# Altium PCB FLYBACK_SWITCHING_POWER_SUPPLY_V1_1.PcbDoc
Units mil, origin at the board's own origin, x right, y up, seen from the top; angles counter-clockwise.
Board outline 3175 x 1725 mil, 2 copper layers (Top Layer, Bottom Layer); 36 components, 23 nets, 88 pads, 4 vias.
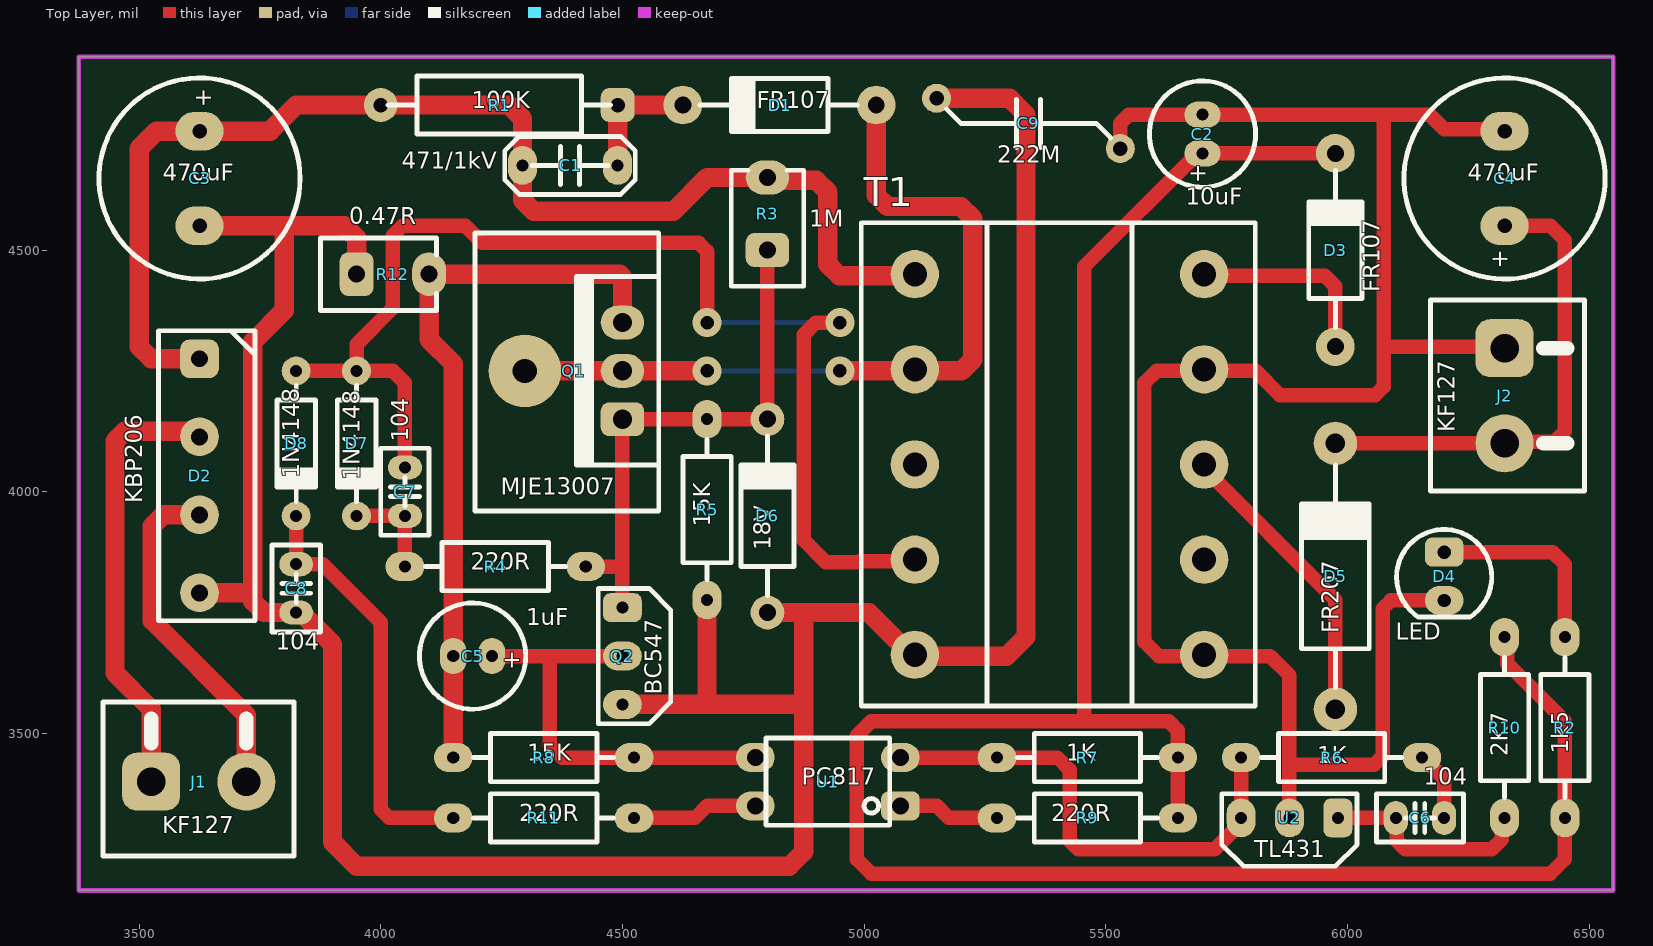
[diagram p0: Top Layer view]
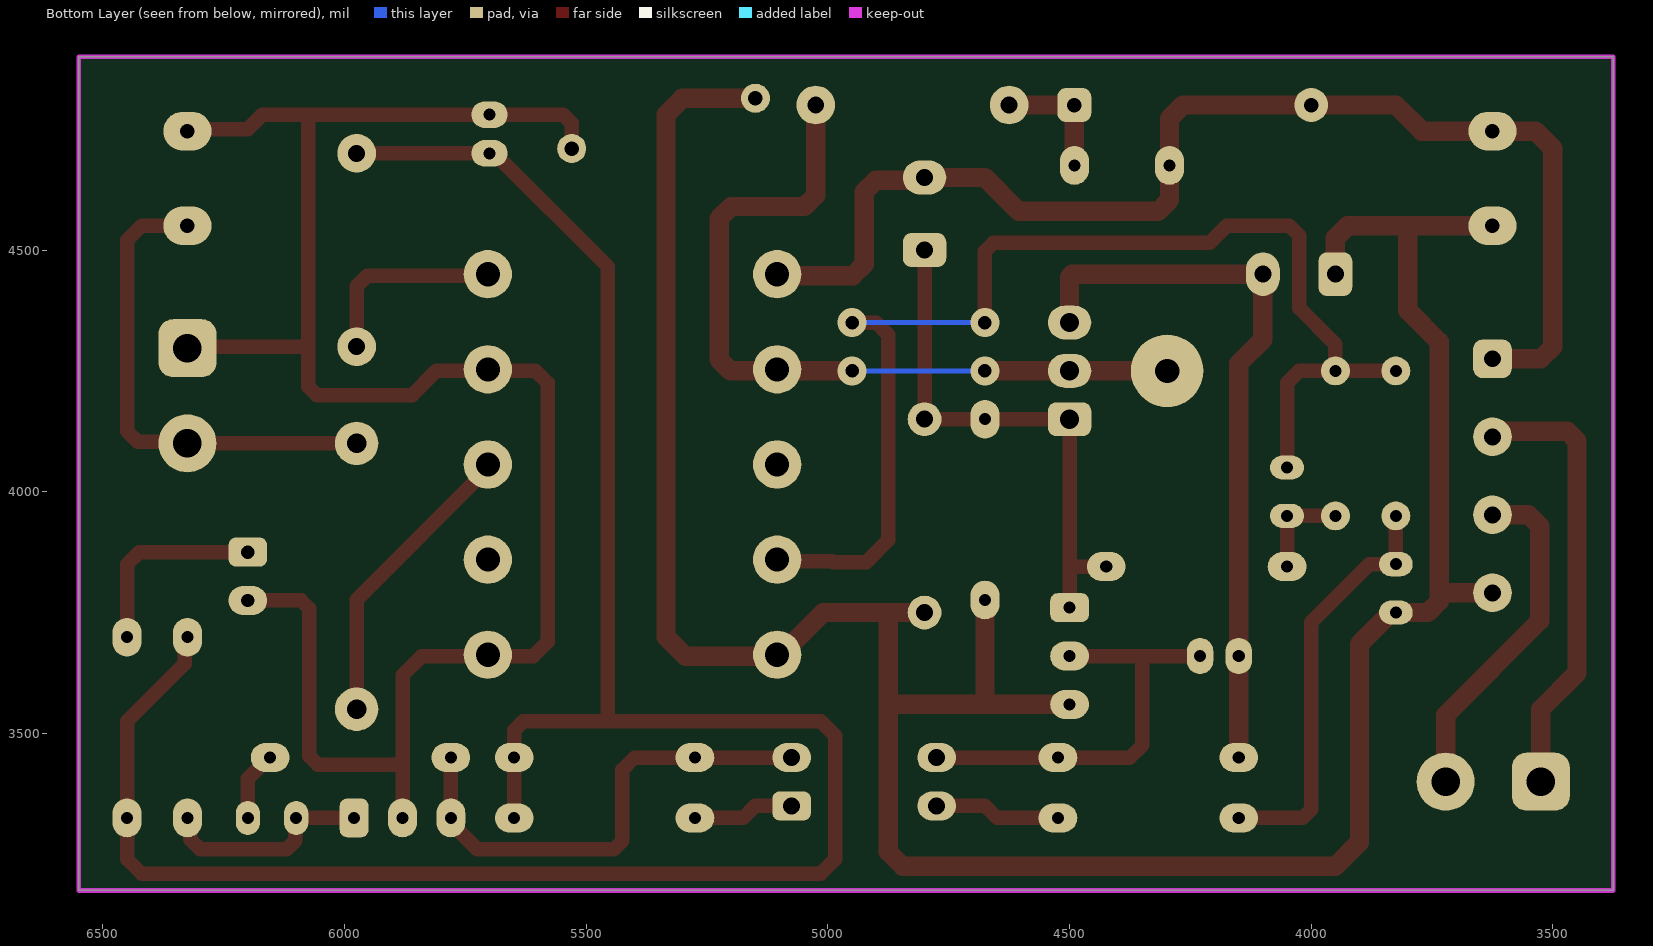
[diagram p1: Bottom Layer view, seen from below]
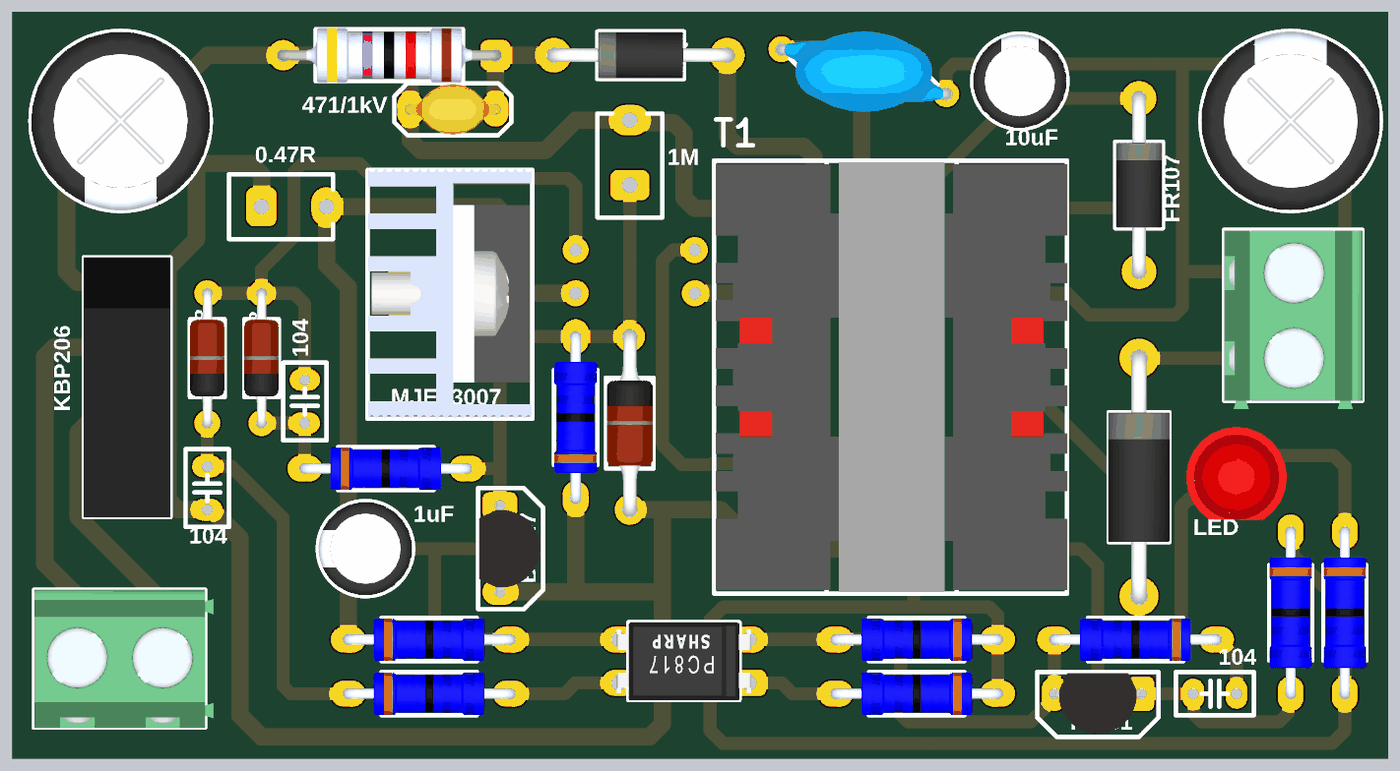
[diagram p2: 3D render of the assembled board from above, using the file's embedded part models]

## Layer stack, top to bottom
Top Solder: solder mask 0.4, Solder Resist, Dk 3.5
Top Layer: signal copper 1.4
Dielectric 1: dielectric 12.6, FR-4, Dk 4.8
Bottom Layer: signal copper 1.4
Bottom Solder: solder mask 0.4, Solder Resist, Dk 3.5

## Board outline
3375,3175 3375,4900 6550,4900 6550,3175

## Design rules (kind name [scope] priority, off if disabled: settings)
Clearance [All] p1: gap=10 ignorepadtopadclearanceinfootprint=FALSE except(0: Arc-Hole Track-Hole SMDPad-Hole THPad-Hole Via-Hole Fill-Hole Poly-Hole Region-Hole Text-Hole)
PolygonConnect [All] p1: connectstyle=Relief reliefconductorwidth=10 reliefentries=4 polygonreliefangle="90 Angle" airgapwidth=10
RoutingVias [All] p1: holewidth=28 width=50 viastyle="Through Hole" minholewidth=28 minwidth=50 maxholewidth=28 maxwidth=50
SolderMaskExpansion [All] p1: expansion=4 istentingtop=FALSE
Width [All] p1: maxlimit=50 minlimit=10 preferedwidth=30
30 further rules are at their usual default settings.

## Components (designator, comment, footprint, x,y, rotation, side; value= is the part's Value field where it differs from the comment)
C1 "471/1kV" CAP_Ceramic_5MM 4391.57,4675 r180 top
C2 "10uF" CAP_RAD_D05x11 5700,4740 r90 top
C3 "470uF" CAP_RAD_D10x12.5 3625,4648 r270 top
C4 "470uF" CAP_RAD_D10x12.5 6325,4648 r90 top
C5 "1uF" CAP_RAD_D05x11 4190,3660 r180 top
C6 "104" CAP_Ceramic_2.5MM 6150,3325 r180 top
C7 "104" CAP_Ceramic_2.5MM 4050,4000 r270 top
C8 "104" CAP_Ceramic_2.5MM 3825,3800 r270 top
C9 "222M" CAP_Ceramic_473M_9.65mm 5340,4762 r180 top
D1 "FR107" DO-204AL-BK 4825,4800 r180 top
D2 "KBP206" DIODE-KBP206 3625,4032.87 r270 top
D3 "FR107" DO-204AL-BK 5975,4500 r90 top
D4 "LED" LED_5MM 6200,3825 r270 top
D5 "FR207" DO-204AC-BK 5975,3825 r90 top
D6 "18V" DO-204AL-RD 4800,3950 r90 top
D7 "1N4148" DO-204AH-RD 3950,4100 r270 top
D8 "1N4148" DO-204AH-RD 3825,4100 r270 top
J1 "KF127" DG127-5.0-02P-14-00AH 3525,3400 r0 top
J2 "KF127" DG127-5.0-02P-14-00AH 6325,4296.85 r270 top
Q1 "MJE13007" TO-220-HEAT-SINK-1 4500,4250 r90 top
Q2 "BC547" TO-92 4500,3660 r270 top
R1 "100K" RES-0.5W-H 4245,4800 r180 top
R2 "1k5" RES-0.25W-H 6450,3512 r270 top
R3 "1M" RES-1W-V 4800,4500 r90 top
R4 "220R" RES-0.25W-H 4237,3845 r0 top
R5 "15K" RES-0.25W-H 4675,3963 r90 top
R6 "1K" RES-0.25W-H 5967,3450 r180 top
R7 "1K" RES-0.25W-H 5462,3450 r180 top
R8 "15K" RES-0.25W-H 4337,3450 r0 top
R9 "220R" RES-0.25W-H 5462,3325 r180 top
R10 "2K7" RES-0.25W-H 6325,3512 r270 top
R11 "220R" RES-0.25W-H 4337,3325 r0 top
R12 "0.47R" RES-1W-V 3950,4450 r0 top
T1 "EE25" TRANSFORMER-EE25-10-6-VERTICAL(5+5) 5404.21,4056.3 r0 top
U1 "PC817" PC817-DIP 4925,3400 r180 top
U2 "TL431" TO-92 5880,3325 r180 top

## Footprints (in the part's own frame and the unit in brackets; to place one, negate y for a bottom-side part, rotate by r counter-clockwise, add the part's x,y. Pads: shape width x height; smd on the part's side, far side on the other; paste and mask are expansions set on the pad)
CAP_Ceramic_2.5MM [mil]
  oval 50x70 hole 25: 1(-50,0) 2(50,0)
  silkscreen extent -90,-50 90,50, body extent -92,-49 92,49, height 289
CAP_Ceramic_5MM [mil]
  oval 60x80 hole 25: 1(-98.43,0) 2(98.43,0)
  silkscreen extent -135,-60 135,60, body extent -110,-59 110,59, height 216
CAP_Ceramic_473M_9.65mm [mil]
  round 60 hole 30: 1(-190,52) 2(190,-52)
  silkscreen extent -170,-50 170,50, body extent -202,-93 202,93, height 354
CAP_RAD_D05x11 [mil]
  oval 55x75 hole 25: 1(-40,0) 2(40,0)
  silkscreen extent -110,-110 110,110, body extent -108,-108 108,108, height 492
CAP_RAD_D10x12.5 [mil]
  oval 80x100 hole 30: 1(-98,0) 2(98,0)
  silkscreen extent -208,-208 208,208, body extent -207,-207 207,207, height 551
DG127-5.0-02P-14-00AH [mil]
  rrect50% 120x120 hole 59.06: 1(0,0)
  round 120 hole 59.06: 2(196.85,0)
  silkscreen extent -100,-154 295,165, body extent -98,-154 315,165, height 398
DIODE-KBP206 [mil]
  rrect50% 80x80 hole 35: 1(-242.13,0)
  round 80 hole 35: 2(-80.71,0) 3(80.71,0) 4(242.13,0)
  silkscreen extent -300,-85 300,115, body extent -300,-85 300,115, height 530
DO-204AC-BK [mil]
  round 90 hole 40: 1(-275,0) 2(275,0)
  silkscreen extent -230,-70 230,70, body extent -293,-71 293,71, height 146
DO-204AH-RD [mil]
  round 60 hole 25: 1(-150,0) 2(150,0)
  silkscreen extent -120,-40 120,40, body extent -161,-39 161,39, height 82
DO-204AL-BK [mil]
  round 80 hole 35: 1(-200,0) 2(200,0)
  silkscreen extent -160,-55 165,55, body extent -216,-53 216,53, height 110
DO-204AL-RD [mil]
  round 70 hole 35: 1(-200,0) 2(200,0)
  silkscreen extent -165,-55 165,55, body extent -216,-53 216,53, height 110
LED_5MM [mil]
  rrect50% 60x80 hole 27.56: 1(-50,0)
  oval 60x80 hole 27.56: 2(50,0)
  silkscreen extent -97,-98 84,98, body extent -116,-116 98,116, height 339
PC817-DIP [mil]
  rrect50% 80x60 hole 35: 1(-150,50)
  oval 80x60 hole 35: 2(-150,-50) 3(150,-50) 4(150,50)
  silkscreen extent -128,-90 128,90, body extent -155,-90 155,90, height 169
RES-0.5W-H [mil]
  rrect50% 70x70 hole 30: 1(-245,0)
  round 70 hole 30: 2(245,0)
  silkscreen extent -230,-60 230,60, body extent -258,-63 258,63, height 143
RES-0.25W-H [mil]
  oval 80x60 hole 25: 1(-187,0) 2(187,0)
  silkscreen extent -145,-50 145,50, body extent -199,-49 199,49, height 109
RES-1W-V [mil]
  rrect50% 70x90 hole 35: 1(0,0)
  oval 70x90 hole 35: 2(150,0)
  silkscreen extent -75,-75 165,75, body extent -79,-79 163,79, height 554
TO-92 [mil]
  rrect50% 60x80 hole 25: 1(-100,0)
  oval 60x80 hole 25: 2(0,0) 3(100,0)
  silkscreen extent -140,-50 140,100, body extent -109,-48 109,93, height 298
TO-220-HEAT-SINK-1 [mil]
  rrect50% 70x90 hole 40: 1(-100,0)
  round 150 hole 50: 2(0,202)
  oval 70x90 hole 40: 2(0,0) 3(100,0)
  silkscreen extent -290,-75 285,305, body extent -288,-74 286,304, height 791
TRANSFORMER-EE25-10-6-VERTICAL(5+5) [mm]
  round 2.54 hole 1.27: 1(-7.6,10) 2(-7.6,5) 3(-7.6,0) 4(-7.6,-5) 5(-7.6,-10) 6(7.6,-10) 7(7.6,-5) 8(7.6,0) 9(7.6,5) 10(7.6,10)
  silkscreen extent -10.41,-12.7 10.29,12.7, body extent -10.3,-12.6 10.3,12.6, height 22.1

## Part data
C1 C6 C7 C8 C9: library part Capacitors(Disc)
C2 C3 C4 C5: library part Capacitor(Radian)
D1 D3: library part Diode-FR107, "1A 1000V"
D2: library part Diode-KBP206
D4: library part "LED 5MM"
D5: library part Diode-FR207
D6: library part Diode-Zener
D7 D8: library part Diode-1N4148, "The fast switching diode"
J1 J2: library part DG127-5.0-02P-14-00AH
Q1: library part Transistor-MJE13007
Q2: library part Transistor-BC547, "VCEO: 45 Vdc / VCBO: 50 Vdc / VEBO: 6.0 Vdc"
R1 R2 R3 R4 R5 R6 R7 R8 R9 R10 R11 R12: library part "Resistors THD"
T1: library part TRANS-EE25-10-6-VERTICAL(5+5)
U1: library part Opto-PC817
U2: library part Ic-TL431

## Via types
v1: diameter 60, hole 28, Top Layer to Bottom Layer, 4 vias

## Nets (pads, with @x,y where several pads share a name; then routed paths per layer and width w, separated by ;. In a path a pad name is that pad's centre, name@x,y a point inside that pad or via, vN(x,y) a via of type N, cw(c..) or ccw(c..) an arc to the next point about the centre after c; other vN are vias at no path point)
GND: C3.2 C8.2 C9.2 D2.4 D6.1 Q2.3 R5.1 R12.1 T1.5 | length 5888
  Top Layer w40: D2.4 3735,3790.75 ; C3.2 3800,4550 ; R12.1 3950,4525 3925,4550 3800,4550 ; Q2.3 4870,3560 ; 4675,3565 R5.1 ; D6.1 4875,3750 ; C9.2 5301,4814 5335,4780 5335,3700 5294.45,3659.45 5100,3659.45 5009.45,3750 4875,3750 ; 3735,3790.75 3735,3773.43 3758.43,3750 C8.2 3828.27,3746.73 3838.27,3746.73 3900,3685 3900,3275 3950,3225 4845,3225 4875,3255 4875,3750 ; 3735,3790.75 3735,4310 3800,4375 3800,4550
NetC1_1: C1.1 D1.2 R1.1 | length 260
  Top Layer w40: C1.1 R1.1 D1.2
NetC1_2: C1.2 C3.1 D2.1 R1.2 R3.2 T1.1 | length 2573.3
  Top Layer w40: D2.1 3525,4275 3500,4300 3500,4710 3536,4746 C3.1 3771,4746 3825,4800 R1.2 4265,4800 4293.15,4771.85 4293.15,4603.43 4316.58,4580 4605,4580 4675,4650 R3.2 4805.74,4644.26 4900.74,4644.26 4925,4620 4925,4470.28 4948.43,4446.85 T1.1@5100,4446.85
NetC2_1: C2.1 D3.2 R2.2 R7.1 R9.1 R10.1 | length 4681.5
  Top Layer w30: R9.1 R7.1 5649,3506 5630,3525 5455,3525 ; C2.1@5696.76,4700 D3.2 ; C2.1 5690,4700 5455,4465 5455,3525 ; R10.1 6331,3693 6331,3644 6450,3525 R2.2 6450,3240 6420,3210 5015,3210 4985,3240 4985,3495 5015,3525 5455,3525
NetC2_2: C2.2 C4.2 C9.1 D4.2 J2.1 T1.6 T1.9 U2.2 | length 4013.3
  Top Layer w30: C9.1 5530,4762.43 5547.57,4780 C2.2 6075,4780 ; U2.2 5880,3435 ; D4.2 6090,3775 6072.5,3757.5 6072.5,3452.57 6054.93,3435 5880,3435 ; J2.1@6325,4300 6075,4300 ; C4.2 6321,4750 6200,4750 6170,4780 6075,4780 ; 5880,3435 5880,3620 5840.55,3659.45 5698.43,3659.45 5610,3659.45 5580,3689.45 5580,4225 5605,4250 5698.43,4250 5810,4250 5860,4200 6057.43,4200 6075,4217.57 6075,4300 ; 6075,4300 6075,4780
NetC4_1: C4.1 D5.2 J2.2 | length 1016.5
  Top Layer w30: D5.2 J2.2 ; J2.2@6325,4103.15 6428.15,4103.15 6450,4125 6450,4520 6420,4550 C4.1
NetC5_1: C5.1 Q2.2 R8.2 U1.3 | length 903.2
  Top Layer w30: C5.1@4230,3650 4230,3653.24 C5.1@4236.76,3660 ; C5.1 C5.1@4236.76,3660 ; Q2.2 4350,3660 ; U1.3 R8.2 4375,3450 4350,3475 4350,3660 ; C5.1@4236.76,3660 4350,3660
NetC5_2: C5.2 Q1.3 R8.1 R12.2 | length 1517.3
  Top Layer w40: R8.1 C5.2 4150,4265 4100,4315 R12.2 4494.14,4450 4500,4444.14 Q1.3
NetC6_1: C6.1 R6.1 | length 145.2
  Top Layer w30: R6.1 6155.88,3450 6200,3405.88 C6.1
NetC6_2: C6.2 R10.2 U2.1 | length 428.4
  Top Layer w30: U2.1@6000,3325 C6.2 6101.57,3323.43 6101.57,3277.57 6119.14,3260 6298.79,3260 6319.26,3280.47 6319.26,3319.26 R10.2
NetC7_1: C7.1 D7.1 D8.1 T1.4 | length 2579.2
  Top Layer w30: D8.1 D7.1 ; C7.1 4050,4225 4025,4250 D7.1 ; v1(4675,4350) 4675,4497.43 4657.43,4515 4210,4515 4175,4550 4045,4550 4025,4530 4025,4380 3950,4305 D7.1 ; v1(4950,4350) 4900,4350 4875,4325 4875,3900 4920.86,3854.14 4988.56,3854.14 4990.72,3856.3 T1.4@5100,3856.3
  Bottom Layer w10: v1(4675,4350) v1(4950,4350)
NetC7_2: C7.2 D7.2 R4.1 | length 205
  Top Layer w30: D7.2 C7.2 R4.1
NetC8_1: C8.1 D8.2 R11.1 | length 869.4
  Top Layer w30: D8.2 C8.1 3880,3850 4000,3730 4000,3342.57 4017.57,3325 R11.1
NetD1_1: D1.1 Q1.2 T1.2 | length 1634.9
  Top Layer w40: Q1.2@4298,4250 4500,4250 v1(4675,4250) ; v1(4950,4250) 5201.57,4250 5225,4273.43 5225,4565 5200,4590 5048.43,4590 5025,4613.43 D1.1
  Bottom Layer w10: v1(4675,4250) v1(4950,4250)
NetD2_2: D2.2 J1.1 | length 924.1
  Top Layer w40: J1.1 3525,3550 3450,3625 3450,4105 3470,4125 3613.58,4125 D2.2
NetD2_3: D2.3 J1.2 | length 716.9
  Top Layer w40: D2.3 3550.6,3952.17 3527.17,3928.73 3527.17,3732.83 3721.85,3538.15 J1.2
NetD3_1: D3.1 T1.10 | length 410.6
  Top Layer w30: T1.10@5698.43,4446.85 5953.15,4446.85 5975,4425 D3.1
NetD4_1: D4.1 R2.1 | length 411.4
  Top Layer w30: D4.1 6425,3875 6450,3850 R2.1
NetD5_1: D5.1 T1.8 | length 617.7
  Top Layer w30: T1.8@5698.43,4053.15 5975,3776.57 D5.1
NetD6_2: D6.2 Q1.1 Q2.1 R3.1 R4.2 R5.2 | length 1116
  Top Layer w30: R4.2 4500,3845 ; Q2.1 4500,3845 ; R3.1 D6.2 R5.2 Q1.1 4500,3845
NetR6_2: R6.2 R7.2 U1.2 U2.3 | length 1027.8
  Top Layer w30: U1.2 R7.2 5400,3450 5425,3425 5425,3277.57 5442.57,3260 5725,3260 5780,3315 R6.2
NetR9_2: R9.2 U1.1 | length 210.4
  Top Layer w30: U1.1 5150,3350 5175,3325 R9.2
NetR11_2: R11.2 U1.4 | length 261.4
  Top Layer w30: R11.2 4650,3325 4675,3350 U1.4
pads on no net: T1.3 T1.7

## Keep-outs
Keep-Out Layer:
  the board outline again, w10

## Dimensions
6550,4900 to 6550,3175 on Mechanical 1
3375,4900 to 6550,4900 on Mechanical 1

## Text inside footprints (layer, text, board x,y; h text height)
C2: Top Overlay "+" at 5718.93,4638.57 h60 r90
C3: Top Overlay "+" at 3606.07,4834.43 h60 r270
C4: Top Overlay "+" at 6343.93,4461.57 h60 r90
C5: Top Overlay "+" at 4291.43,3678.93 h60 r180